# EAGLE board LAYOUT_BOARD 12V (06-07-2025) (EAGLE 9.7.0)
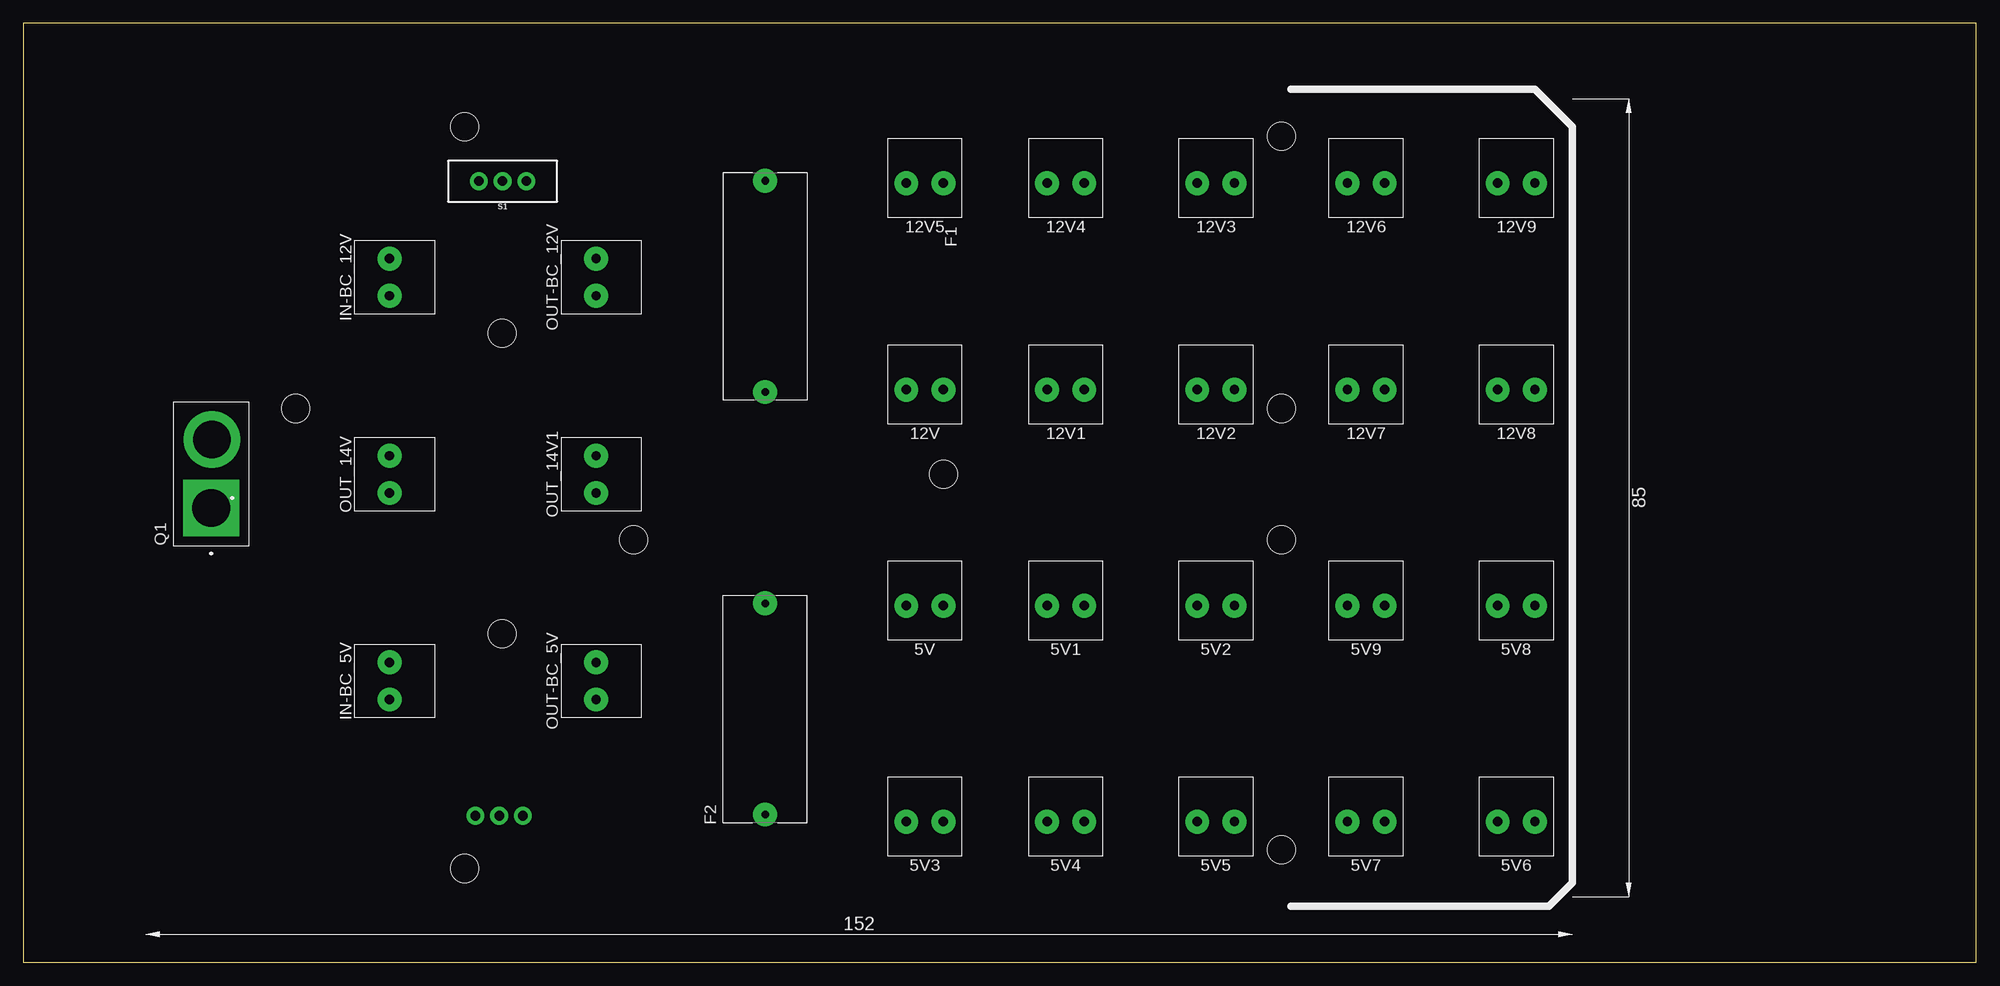
[diagram p0: board, top side]
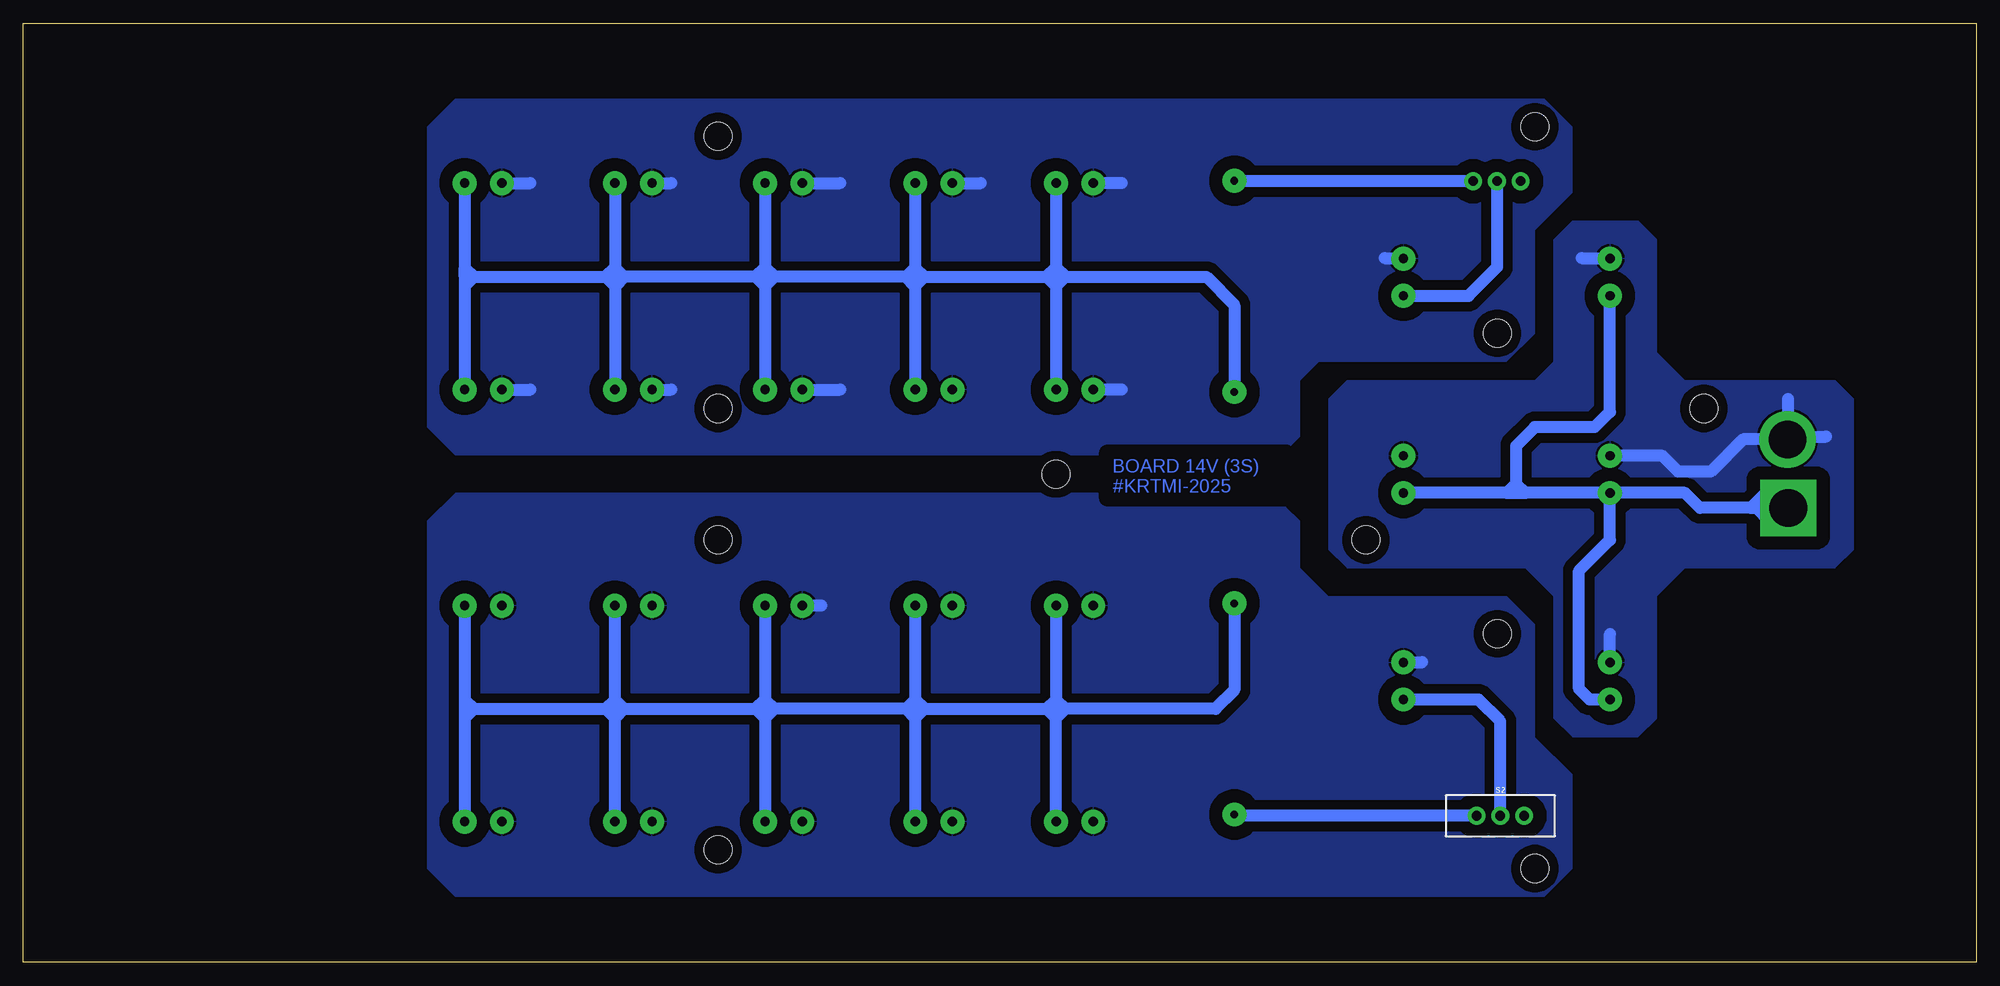
[diagram p1: board, bottom side, seen from below]

Size 208 x 100 mm. Coordinates in mm from the lower left corner, seen from the top.
Outline: 0,0 208,0 208,100 0,100 0,0
Copper layers (1*16): Top / Bottom
Stack-up Default Layer Stack: Top SilkScreen Epoxy Ink / Top SolderMask SR:Green 0.0254mm Dk 4.3 / Top Surface Finish Lead-Free 0.02mm / Top CuFoil:007 0.035mm / Dielectric-1 User Defined 1.5mm / Bottom CuFoil:007 0.035mm / Bottom Surface Finish Lead-Free 0.02mm / Bottom SolderMask SR:Green 0.0254mm Dk 4.3 / Bottom SilkScreen Epoxy Ink
Design rules: minimum copper width 6mil, minimum drill size 0.35mm, copper clearance wire_polygon to wire_polygon 0.8mm, copper clearance wire_polygon to pad_smd 0.8mm, copper clearance wire_polygon to via 6mil, copper clearance pad_smd to pad_smd 6mil, copper clearance pad_smd to via 6mil, copper clearance via to via 6mil, copper clearance smd to pad (same net) 6mil, copper clearance smd to via (same net) 6mil, copper clearance smd to smd (same net) 6mil, dimension clearance 40mil, via restrict clearance 0mil, restrict clearance 0mil, drill distance 6mil, keepout clearance 0mil
Holes 3 mm at 134,12 134,59 134,88 134,45 98,52 47,89 65,45 51,67 51,35 47,10 29,59

## Footprints (pad centres in the part's own frame; a part is rotated, then mirrored left to right if it is on the bottom)
B2P-VH_396-2N = drill 1 pad 2.54: 1 0,0; 2 3.96,0
FUSE_4628 = drill 0.8 pad 2.54: 1 -11.25,0; 2 11.25,0
AMASS_XT60PB-M = drill 4 pad 6 square: 1 -3.6,0 | drill 4 pad 6: 2 3.7,-0.095
SWITCH_SPDT_PTH_11.6X4.0MM = drill 1.016 pad 1.88: 1 0,2.54; 2 0,0; 3 0,-2.54

## Placement (x,y rotation side)
5V  B2P-VH  [B2P-VH_396-2N]  98,38 180 top
5V1  B2P-VH  [B2P-VH_396-2N]  113,38 180 top
5V2  B2P-VH  [B2P-VH_396-2N]  129,38 180 top
5V3  B2P-VH  [B2P-VH_396-2N]  98,15 180 top
5V4  B2P-VH  [B2P-VH_396-2N]  113,15 180 top
5V5  B2P-VH  [B2P-VH_396-2N]  129,15 180 top
5V6  B2P-VH  [B2P-VH_396-2N]  161,15 180 top
5V7  B2P-VH  [B2P-VH_396-2N]  145,15 180 top
5V8  B2P-VH  [B2P-VH_396-2N]  161,38 180 top
5V9  B2P-VH  [B2P-VH_396-2N]  145,38 180 top
12V  B2P-VH  [B2P-VH_396-2N]  98,61 180 top
12V1  B2P-VH  [B2P-VH_396-2N]  113,61 180 top
12V2  B2P-VH  [B2P-VH_396-2N]  129,61 180 top
12V3  B2P-VH  [B2P-VH_396-2N]  129,83 180 top
12V4  B2P-VH  [B2P-VH_396-2N]  113,83 180 top
12V5  B2P-VH  [B2P-VH_396-2N]  98,83 180 top
12V6  B2P-VH  [B2P-VH_396-2N]  145,83 180 top
12V7  B2P-VH  [B2P-VH_396-2N]  145,61 180 top
12V8  B2P-VH  [B2P-VH_396-2N]  161,61 180 top
12V9  B2P-VH  [B2P-VH_396-2N]  161,83 180 top
F1  FUSE_HOLDER  [FUSE_4628]  79,72 270 top
F2  FUSE_HOLDER  [FUSE_4628]  79,27 90 top
IN-BC_5V  B2P-VH  [B2P-VH_396-2N]  39,28 90 top
IN-BC_12V  B2P-VH  [B2P-VH_396-2N]  39,71 90 top
OUT-BC_5V  B2P-VH  [B2P-VH_396-2N]  61,28 90 top
OUT-BC_12V  B2P-VH  [B2P-VH_396-2N]  61,71 90 top
OUT_14V  B2P-VH  [B2P-VH_396-2N]  39,50 90 top
OUT_14V1  B2P-VH  [B2P-VH_396-2N]  61,50 90 top
Q1  XT60_YELLOW  [AMASS_XT60PB-M]  20,52 90 top
S1  [SWITCH_SPDT_PTH_11.6X4.0MM]  51.04,83.2 90 top
S2  [SWITCH_SPDT_PTH_11.6X4.0MM]  50.67,15.62 270 bottom

## Library data of the parts
5V 5V1-5V9 12V 12V1-12V9 IN-BC_5V IN-BC_12V OUT-BC_5V OUT-BC_12V OUT_14V OUT_14V1 = Connector; CATEGORY: Header; DATASHEET: https://www.jst-mfg.com/product/pdf/eng/eVH.pdf; DESCRIPTION: Connector Header Through Hole 3 position 0.156" (3.96mm); MANUFACTURER: JST Sales America Inc.; MPN: B2P-VH; OPERATING_TEMPERATURE: -25°C ~ 85°C; PACKAGE_SIZE: NA; PACKAGE_TYPE: THT; PART_STATUS: ACTIVE; PITCH: 0.156" (3.96mm); ROHS: COMPLIANT; SERIES: VH; SUBCATEGORY: Rectangular Connectors; TYPE: Header-Male Pin-Board to Cable/Wire-Through Hole
F1 F2 = 4628; AVAILABILITY: In Stock; CHECK_PRICES: https://www.snapeda.com/parts/4628/Keystone/view-part/?ref=eda; DESCRIPTION: Fuse Holder 5 A 250V 1 Circuit Cartridge Through Hole; MF: Keystone; MP: 4628; PACKAGE: None; PRICE: None; SNAPEDA_LINK: https://www.snapeda.com/parts/4628/Keystone/view-part/?ref=snap
Q1 = XT60_YELLOW; AVAILABILITY: Not in stock; CHECK_PRICES: https://www.snapeda.com/parts/XT60%20YELLOW/Pololu/view-part/?ref=eda; DESCRIPTION: Power connector; 65A; PIN: 2; Colour: yellow; MF: Pololu; MP: XT60 YELLOW; PACKAGE: None; PRICE: None; SNAPEDA_LINK: https://www.snapeda.com/parts/XT60%20YELLOW/Pololu/view-part/?ref=snap
S1 S2 = SparkFun-Switches; PROD_ID: SWCH-08261; SF_SKU: COM-00102

## Nets
5V: 5V1.1 5V2.1 5V3.1 5V4.1 5V5.1 5V6.1 5V7.1 5V8.1 5V9.1 5V.1 F2.2
12V: 12V1.1 12V2.1 12V3.1 12V4.1 12V5.1 12V6.1 12V7.1 12V8.1 12V9.1 12V.1 F1.2
14V: IN-BC_5V.1 IN-BC_12V.1 OUT_14V1.1 OUT_14V.1 Q1.1
GND1: IN-BC_5V.2 IN-BC_12V.2 OUT_14V1.2 OUT_14V.2 Q1.2
GND2: 12V1.2 12V2.2 12V3.2 12V4.2 12V5.2 12V6.2 12V7.2 12V8.2 12V9.2 12V.2 OUT-BC_12V.2
GND3: 5V1.2 5V2.2 5V3.2 5V4.2 5V5.2 5V6.2 5V7.2 5V8.2 5V9.2 5V.2 OUT-BC_5V.2
N$1: OUT-BC_12V.1 S1.2
N$3: OUT-BC_5V.1 S2.2
N$4: F2.1 S2.3
N$5: F1.1 S1.3

## Tracks (layer width: path | path; a pad name or v marks a point on that pad's centre or on a via)
5V
  Bottom 1.27: F2.2 79,29 81,27 97,27 | 112,27 99,27 | 112,27 113,27 113,28 | 114,27 128,27 | 129,28 128,27 | 5V2.1 129,28 | 128,27 129,26 | 129,26 5V5.1 | 5V1.1 113,28 | 113,26 5V4.1 | 112,27 113,28 | 113,28 114,27 | 114,27 113,26 | 112,27 113,26 | 5V.1 98,28 | 5V3.1 98,26 | 99,27 98,28 | 98,28 97,27 | 97,27 98,26 | 98,26 99,27 | 99,27 97,27 | 128,27 130,27 | 144,27 130,27 | 144,27 145,28 | 145,28 5V9.1 | 5V7.1 145,26 | 145,26 144,27 | 144,27 146,27 | 160,27 146,27 | 161,28 160,27 | 5V8.1 161,28 | 160,27 161,26 | 161,26 5V6.1 | 129,28 130,27 | 130,27 129,26 | 146,27 145,28 | 146,27 145,26 | 161,28 161,26
12V
  Bottom 1.27: F1.2 79,70 82,73 97,73 | 97,73 98,72 | 98,72 12V.1 | 97,73 98,73 | 98,73 99,73 | 112,73 99,73 | 112,73 113,72 | 113,72 12V1.1 | 112,73 113,73 | 114,73 128,73 | 128,73 129,72 | 129,72 12V2.1 | 12V4.1 113,74 | 12V5.1 98,74 | 98,74 98,73 | 12V3.1 129,74 | 129,74 129,73 | 129,73 129,72 | 128,73 129,74 | 113,74 112,73 | 113,74 114,73 | 113,72 114,73 | 97,73 98,74 | 98,74 99,73 | 99,73 98,72 | 129,73 130,73 | 130,73 144,73 | 144,73 145,74 | 12V6.1 145,74 | 144,73 145,72 | 145,72 12V7.1 | 144,73 146,73 | 160,73 146,73 | 160.5,72.5 161,73 | 161,73 161,74 | 12V9.1 161,74 | 160,73 160.5,72.5 | 160.5,72.5 161,72 | 161,72 12V8.1 | 161,74 160,73 | 161,73 161,72 | 145,74 146,73 | 146,73 145,72 | 129,74 130,73 | 130,73 129,72
14V
  Bottom 1.27: Q1.1 23.4,48.4 | 24,48.4 29.4,48.4 31,50 OUT_14V.1 | 24,48.4 22.4,50 22,50 | 24,48.4 23.4,48.4 | 23.4,48.4 22,47 | OUT_14V.1 48,50 | 50,50 OUT_14V1.1 | IN-BC_5V.1 41.16,28 42.3,29.14 42.3,41.7 39,45 OUT_14V.1 | 49,51 49,55 47,57 40.63,57 39,58.63 IN-BC_12V.1 | 49,51 48,50 | 49,51 50,50 | 50,50 48,50
GND1
  Bottom 1.27: 60.96,54 OUT_14V1.2 | IN-BC_12V.2 39.04,75 42,75 | IN-BC_5V.2 39,35 | Q1.2 20,55.8 20,60 | Q1.2 19.8,56 16,56 | Q1.2 24.84,55.7 28.27,52.27 31.73,52.27 33.42,53.96 OUT_14V.2
  pour Bottom: 13,44 15,42 31,42 34,39 34,26 36,24 43,24 45,26 45,39 48,42 67,42 69,44 69,60 67,62 47,62 45,64 45,77 43,79 36,79 34,77 34,65 31,62 15,62 13,60
GND2
  Bottom 1.27: OUT-BC_12V.2 61.04,75 63,75 | 91,83 12V5.2 | 91,61 12V.2 | 12V4.2 106,83 | 12V3.2 121,83 | 12V2.2 121,61 | 12V8.2 154,61 | 12V9.2 154,83 | 12V6.2 139,83 | 12V7.2 139,61
  pour Bottom: 43,89 43,82 47,78 47,67 50,64 70,64 72,62 72,56 74,54 162,54 165,57 165,89 162,92 46,92
GND3
  Bottom 1.27: OUT-BC_5V.2 59.04,31.96 59,32 | 123,38 5V2.2
  pour Bottom: 43,20 43,10 46,7 162,7 165,10 165,47 162,50 75,50 72,47 72,42 69,39 50,39 47,36 47,24
N$1
  Bottom 1.27: OUT-BC_12V.1 54.08,71 51.04,74.04 S1.2
N$3
  Bottom 1.27: S2.2 50.67,25.67 53,28 OUT-BC_5V.1
N$4
  Bottom 1.27: S2.3 78.87,15.62 F2.1
N$5
  Bottom 1.27: F1.1 78.95,83.2 S1.3

## Text on the board
Bottom: BOARD 14V (3S) / #KRTMI-2025